# Altium PCB MP4462_MP4560_AllCanUse.PcbDoc
Units mm, origin at the board's own origin, x right, y up, seen from the top; angles counter-clockwise.
Board outline 45.26 x 45.25 mm, 2 copper layers (Top Layer, Bottom Layer); 24 components, 12 nets, 56 pads, 41 vias.
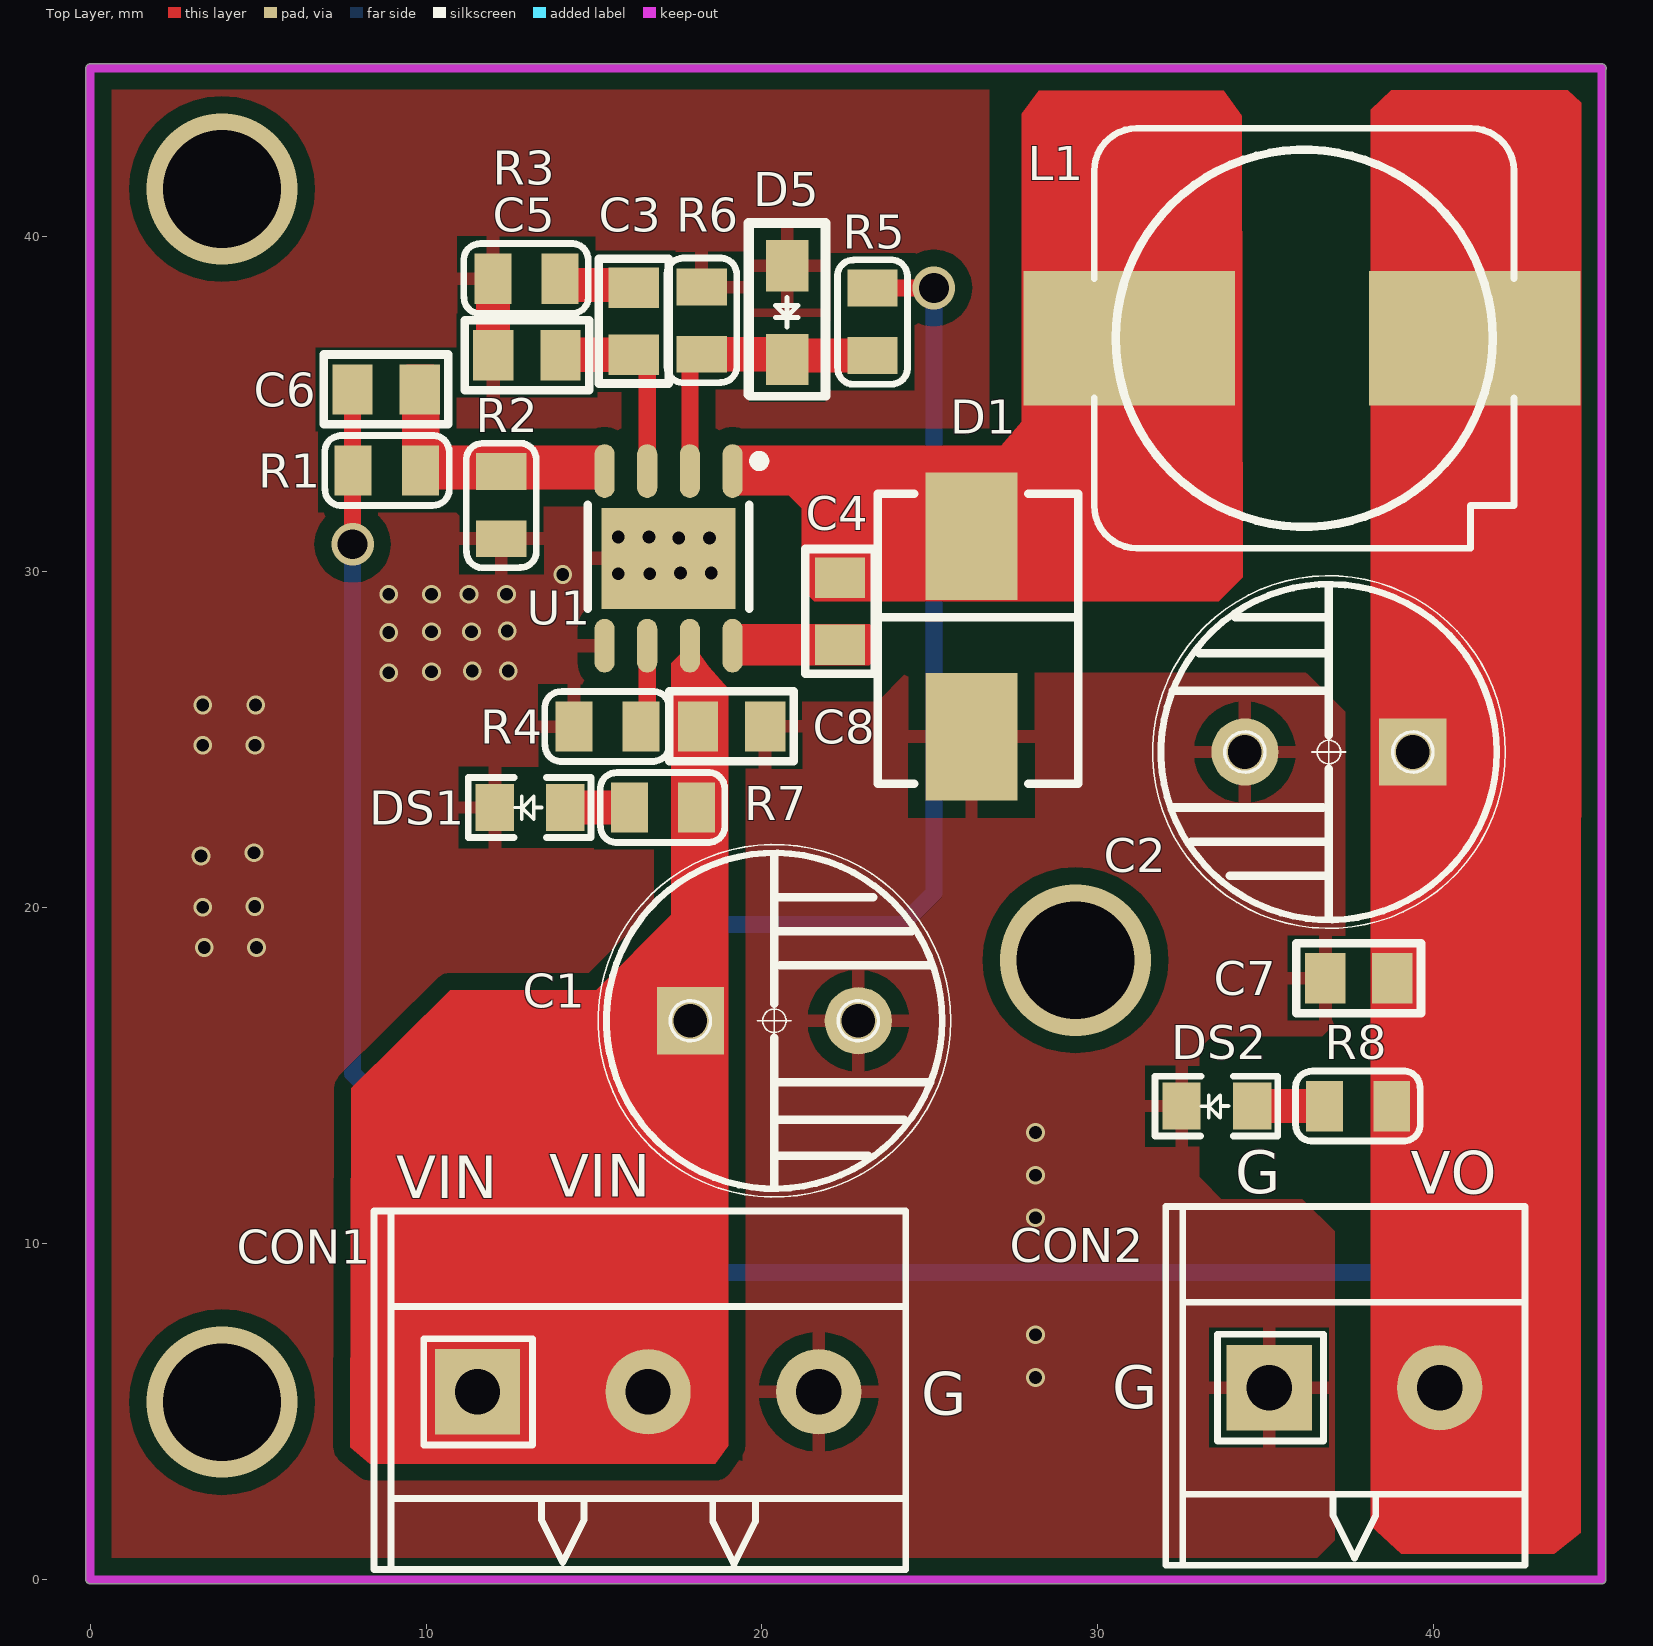
[diagram p0: Top Layer view]
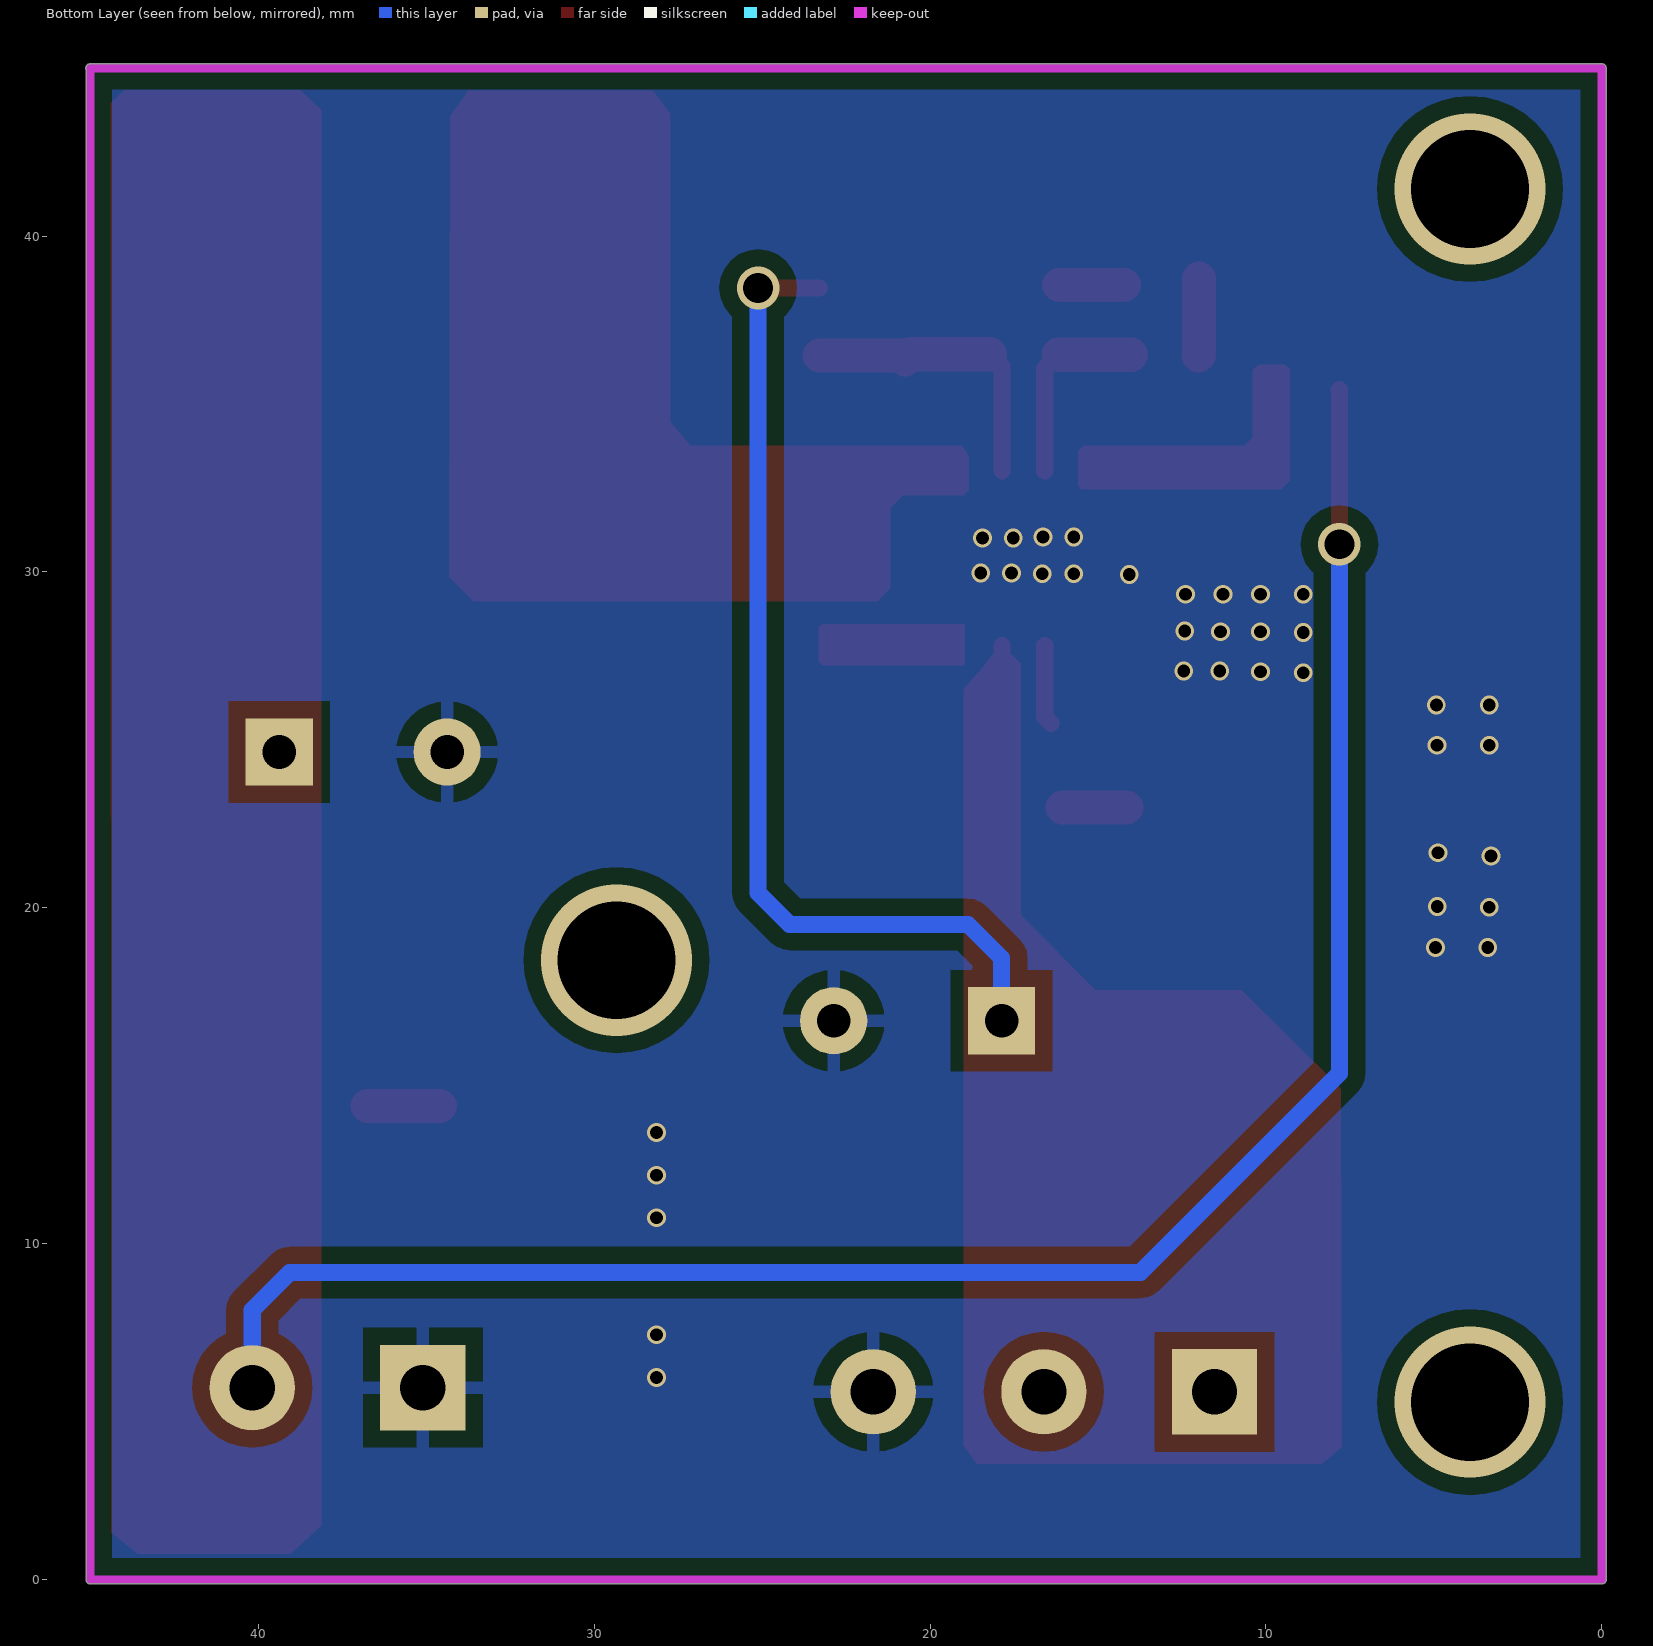
[diagram p1: Bottom Layer view, seen from below]

## Layer stack, top to bottom
Top Layer: signal copper 0.0356
Dielectric: dielectric 0.32, FR-4, Dk 4.8
Bottom Layer: signal copper 0.0356

## Board outline
0,-0.127 cw(c0,0) -0.127,0 -0.127,45 cw(c0,45) 0,45.127 45,45.127 cw(c45,45) 45.004,45.127 cw(c45.009,45) 45.136,45 cw(c45.009,45) 45.127,44.953 45.127,0 cw(c45,0) 45,-0.127

## Design rules (kind name [scope] priority, off if disabled: settings)
Clearance Clearance_P [InPolygon] p1: gap=0.508
Clearance [All] p2: gap=0.254
ComponentClearance [All] p1: gap=0 collisioncheckmode=3 verticalgap=0 showdistances=FALSE
HoleSize [All] p1: absolutevalues=TRUE maxlimit=127 minlimit=0.025 maxpercent=80.000 minpercent=20.000
MinimumSolderMaskSliver [All] p1: minsoldermaskwidth=0
PolygonConnect PolygonConnect_P [(InPadClass('All Pads'))] p1: connectstyle=Relief reliefconductorwidth=0.381 reliefentries=4 polygonreliefangle="90 Angle"
PolygonConnect [All] p2: connectstyle=Direct reliefconductorwidth=0.254 reliefentries=4 polygonreliefangle="90 Angle"
RoutingVias [All] p1: holewidth=1.016 width=1.27 viastyle="Through Hole" minholewidth=0.127 minwidth=0.254 maxholewidth=1.27 maxwidth=1.524
SilkToSilkClearance [All] p1: silktosilkclearance=0
SilkscreenOverComponentPads SilkToSolderMaskClearance [IsPad] p1: minsilkscreentomaskgap=0
SolderMaskExpansion [All] p1: expansion=0.102
Width Width_1 [All] p1: maxlimit=20 minlimit=0.254 preferedwidth=0.254
Width [All] p2: maxlimit=0.254 minlimit=0.254 preferedwidth=0.254
23 further rules are at their usual default settings.

## Components (designator, comment, footprint, x,y, rotation, side; value= is the part's Value field where it differs from the comment)
C1 "CAP-E" C-E-5X10X12mm 20.371,16.637 r0 top
C2 "CAP-E" C-E-5X10X12mm 36.881,24.638 r180 top
C3 "Cap" C0805 16.18,37.465 r90 top
C4 "Cap" C0805 22.327,28.829 r270 top
C5 "Cap" C0805 13.005,36.449 r180 top
C6 "Cap" C0805 8.814,35.433 r0 top
C7 "Cap" C0805 37.77,17.907 r180 top
C8 "Cap" C0805 19.101,25.4 r0 top
CON1 "CON 1X3" KF128-5.08mm-3P 11.532,5.588 r0 top
CON2 "CON 1X2" KF128-5.08mm-2P 35.103,5.715 r0 top
D1 "B380" LC-SMB(DO-214AA)_S1 26.238,28.016 r270 top
D5 "1N4733" SOD-123 20.752,39.116 r270 top
DS1 "LED" LED-0805 14.148,22.987 r180 top
DS2 "LED" LED-0805 34.595,14.097 r180 top
L1 "L-SMD" SLF12575T 36.144,36.957 r180 top
R1 "RES" R0805 9.83,33.02 r180 top
R2 "RES" R0805 12.243,30.988 r90 top
R3 "RES" R0805 11.989,38.735 r0 top
R4 "RES" R0805 14.402,25.4 r0 top
R5 "RES" R0805 23.292,36.449 r90 top
R6 "RES" R0805 18.212,38.481 r270 top
R7 "RES" R0805 16.053,22.987 r0 top
R8 "RES" R0805 36.754,14.097 r0 top
U1 "MP4462_MP4560" LC-SOIC-8_EP_150mil 17.221,30.404 r180 top

## Footprints (in the part's own frame and the unit in brackets; to place one, negate y for a bottom-side part, rotate by r counter-clockwise, add the part's x,y. Pads: shape width x height; smd on the part's side, far side on the other; paste and mask are expansions set on the pad)
C0805 [mm]
  rect 1.2x1.5 smd: 1(-1,0) 2(1,0)
  silkscreen extent -1.85,-1.04 1.85,1.04, body extent -1,-0.62 1,0.63, height 0.78
C-E-5X10X12mm [mm] "5X10X12mm"
  rect 2x2 hole 1: 1(-2.5,0)
  round 2 hole 1: 2(2.5,0)
  silkscreen extent -5.25,-5.25 5.25,5.25, body extent -5.05,-5.03 5,5.03, height 13.03
KF128-5.08mm-2P [mm]
  rect 2.54x2.54 hole 1.35: 1(0,0)
  round 2.54 hole 1.35: 2(5.08,0)
  silkscreen extent -3.08,-5.29 7.62,5.39, body extent -3.13,-5.25 7.63,5.25, height 14.3
KF128-5.08mm-3P [mm]
  rect 2.54x2.54 hole 1.35: 1(0,0)
  round 2.54 hole 1.35: 2(5.08,0) 3(10.16,0)
  silkscreen extent -3.08,-5.29 12.75,5.39, body extent -3.14,-5.23 12.7,5.27, height 14.3
LC-SMB(DO-214AA)_S1 [mm]
  rect 3.8x2.743 smd: 1(2.921,0) 2(-3.048,0)
  silkscreen extent -4.32,-2.79 4.32,3.18
LC-SOIC-8_EP_150mil [mm]
  rect 4x3 smd: 0(0,0)
  oval 0.6x1.6 smd: 1(-1.905,-2.6) 2(-0.635,-2.6) 3(0.635,-2.6) 4(1.905,-2.6) 5(1.905,2.6) 6(0.635,2.6) 7(-0.635,2.6) 8(-1.905,2.6)
  silkscreen extent -2.85,-3.05 2.4,1.5
LED-0805 [mm]
  rect 1.143x1.4 smd: A(0,0) K(2.1,0)
  silkscreen extent -0.76,-0.89 2.89,0.89, body extent 0.05,-0.59 2.07,0.66, height 1.1
R0805 [mm]
  rect 1.1x1.5 smd: 1(0,0) 2(2,0)
  silkscreen extent -0.86,-1.04 2.84,1.04, body extent 0.02,-0.62 2.02,0.63, height 0.78
SLF12575T [mm] "SLF12575T 功率电感 TDK"
  rect 6.3x4 smd: 1(-5.08,0) 2(5.207,0)
  silkscreen extent -6.25,-6.25 6.25,6.25
SOD-123 [mil] "1206体积"
  rect 60x50 smd: 1(0,0) 2(110,0)
  silkscreen extent -50,-45 153,46, body extent -20,-32 126,31, height 50

## Part data
C1 C2: "电解电容"
C3 C4 C5 C6 C7 C8: library part CAP-SMD, "SMD-CAP（陶瓷电容）"
D1: library part D-Schottky, "Diode Schottky"
D5: library part D-Manostat, "Diode Manostat"
L1: "Inductor"
R1 R2 R3 R4 R5 R6 R7 R8: "Resistor"

## Via types
v1: diameter 0.559, hole 0.381, Top Layer to Bottom Layer, 28 vias
v2: diameter 0.559, hole 0.381, Top Layer to Bottom Layer, tented both sides, 8 vias
v3: diameter 4.5, hole 3.5, Top Layer to Bottom Layer, 3 vias
v4: diameter 1.27, hole 0.889, Top Layer to Bottom Layer, tented both sides, 2 vias

## Nets (pads, with @x,y where several pads share a name; then routed paths per layer and width w, separated by ;. In a path a pad name is that pad's centre, name@x,y a point inside that pad or via, vN(x,y) a via of type N, cw(c..) or ccw(c..) an arc to the next point about the centre after c; other vN are vias at no path point)
GND: C1.2 C2.2 C5.2 C7.2 C8.2 CON1.3 CON2.1 D1.1 D5.1 DS1.K DS2.K R2.1 R3.1 R4.1 R6.1 U1.0 U1.5 | length 2.3
  Top Layer w1.016: R3.1 11.989,36.465 C5.2
  other v1: 28.143,6.02 28.143,7.29 28.143,10.77 28.143,12.04 28.143,13.31 3.395,18.821 4.953,18.821 3.353,20.015 4.902,20.041 3.302,21.539 4.877,21.641 3.353,24.841 4.911,24.841 3.353,26.035 4.928,26.035 8.89,27 10.16,27.026 11.379,27.051 12.446,27.051 8.89,28.194 10.16,28.219 11.354,28.219 12.421,28.245 8.89,29.337 10.16,29.337 11.278,29.337 12.395,29.337 14.072,29.921
  other v2: 15.723,29.947 16.662,29.947 17.577,29.972 18.491,29.972 17.526,31.013 18.44,31.013 15.723,31.039 16.637,31.039
NetC3_1: C3.1 C5.1 U1.3 | length 5.8
  Top Layer w0.508: C5.1 C5.1@14.021,36.465 ; C3.1 16.586,36.059 U1.3
  Top Layer w1.016: C5.1@14.021,36.465 C3.1
NetC3_2: C3.2 R3.2 | length 1.9
  Top Layer w1.016: R3.2@14.233,38.541 C3.2@16.154,38.541
NetC4_1: C4.1 D1.2 L1.2 U1.1
NetC4_2: C4.2 U1.8
NetC6_2: C6.2 R1.1 R2.2 U1.4
NetD5_2: D5.2 R5.1 R6.2 U1.2 | length 8.8
  Top Layer w0.508: U1.2 17.856,36.125 R6.2
  Top Layer w1.016: R6.2 20.593,36.481 D5.2 20.879,36.449 R5.1
NetDS1_A: DS1.A R7.1 | length 1.9
  Top Layer w1.016: DS1.A R7.1
NetDS2_A: DS2.A R8.1 | length 2.2
  Top Layer w1.016: DS2.A R8.1
NetR4_2: R4.2 U1.6 | length 2.4
  Top Layer w0.508: R4.2@16.402,25.495 16.586,25.679 U1.6
VIN: C1.1 C8.1 CON1.1 CON1.2 R5.2 R7.2 U1.7 | length 58.8
  Top Layer w0.508: U1.7 17.856,25.549 C8.1@18.053,25.352 ; R5.2 23.298,38.456 v4(25.121,38.456)
  Top Layer w1: 9.068,5.588 14.148,5.588 17.871,9.311 C1.1 17.958,16.637 18.053,16.732 R7.2 C8.1@18.053,25.352
  Bottom Layer w0.508: C1.1 17.871,18.506 18.872,19.507 22.276,19.507 24.181,19.507 25.121,20.447 v4(25.121,38.456)
VOUT: C2.1 C6.1 C7.1 CON2.2 L1.1 R1.2 R8.2 | length 58
  Top Layer w0.508: v4(7.814,30.826) C6.1 C6.1@7.83,35.417
  Bottom Layer w0.508: v4(7.814,30.826) 7.814,15.072 13.741,9.144 39.065,9.144 40.183,8.026 CON2.2
copper on no net:
  other v3: 3.925,5.282 29.337,18.44 3.925,41.402

## Polygon pours and split planes (outlines as drawn)
GND on Top Layer "Top Overlay-No Net" (solid, remove dead copper, pour order 1000): 26.772,45.212 26.772,32.657 26.255,32.115 20.481,32.115 19.448,31.029 19.448,25.455 19.448,0.049 19.495,0 0.178,0 0.178,45.212
GND on Top Layer "Top Overlay-No Net" (solid, remove dead copper, pour order 1000): 19.431,0.635 36.271,0.635 36.525,0.635 37.059,1.168 37.059,9.906 37.059,10.363 36.093,11.328 33.68,11.328 33.122,11.887 33.02,11.989 33.02,14.783 33.02,15.799 33.401,16.18 36.678,16.18 37.363,16.866 37.363,25.832 36.246,26.949 36.195,27 24.79,27 24.308,27 23.444,26.137 19.482,26.137 19.431,26.187
GND on Bottom Layer "Top Overlay-No Net" (solid, remove dead copper): 0,45 45.009,45 45.009,0.009 45,0 0,0

## Keep-outs
Keep-Out Layer:
  lines w0.254: 45,45 0,45 0,0 45,0 45,44.991 45.009,45

## Other copper
Top Layer:
  region net VIN: 17.551,27.534 18.161,27.534 18.263,27.381 18.415,27.178 18.999,26.518 18.999,3.988 18.618,3.454 8.331,3.454 7.747,3.937 7.772,14.63 10.719,17.551 15.062,17.551 17.297,19.787 17.297,27.28
  region net NetC6_2: 15.494,32.461 15.596,32.563 15.596,33.604 15.443,33.757 10.643,33.757 10.389,34.011 10.389,36.017 10.236,36.17 9.423,36.17 9.296,36.043 9.296,32.715 9.55,32.461
  region net NetC4_1: 18.847,33.452 18.847,32.436 18.999,32.283 20.803,32.283 21.184,31.902 21.184,29.515 21.565,29.134 33.604,29.134 34.315,29.845 34.29,43.586 33.757,44.323 28.245,44.323 27.737,43.637 27.737,34.468 27.127,33.757 19.05,33.757
  region net NetC4_2: 18.974,28.448 23.216,28.448 23.317,28.372 23.317,27.33 23.19,27.229 18.999,27.229 18.974,27.254
  region net VOUT: 38.125,43.764 38.735,44.348 43.993,44.348 44.399,43.967 44.374,1.397 43.586,0.762 39.04,0.762 38.125,1.6

## Silkscreen, mask and mechanical layers (free items; w line width, h text height)
Top Overlay:
  text "G" at 34.087,11.506 h1.27
  text "VO" at 39.319,11.481 h1.27
  text "VIN" at 13.665,11.405 h1.27
  text "VIN" at 9.119,11.354 h1.27
  text "G" at 30.429,5.105 h1.27
  text "G" at 24.74,4.902 h1.27

## Dimensions
0,45 to 45,44.991 on Top Overlay
0,45 to 0,0 on Top Overlay